# Altium PCB JUNORPC6Cv3.PcbDoc (part 2 of 2)
Units mm, origin at the board's own origin, x right, y up, seen from the top; angles counter-clockwise.
Board outline 175.76 x 100.76 mm, 8 copper layers (Top Layer, Internal Plane 1, Signal Layer 1, Internal Plane 2, Signal Layer 2, Internal Plane 3, Internal Plane 4, Bottom Layer), stack 1.684 mm thick; 107 components, 160 nets, 1032 pads, 524 vias.
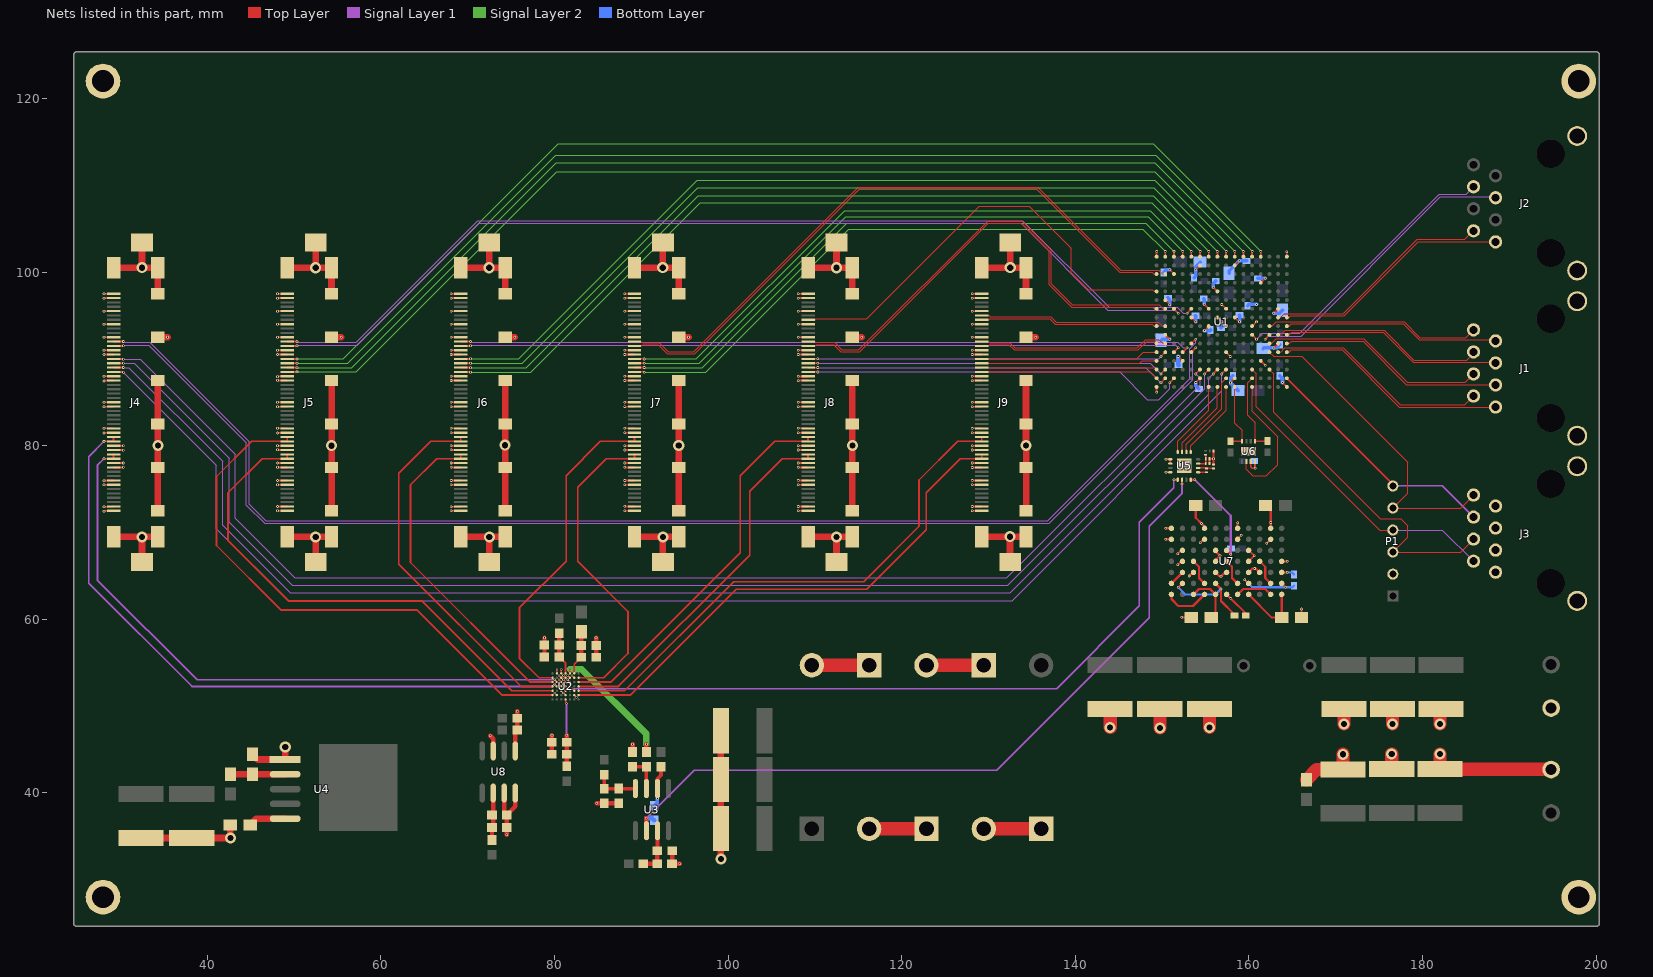
[diagram p8: the nets of this part, all layers, seen from the top]

## Via types
v1: diameter 0.305, hole 0.152, Top Layer to Bottom Layer, 454 vias
v2: diameter 1.27, hole 0.711, Top Layer to Bottom Layer, 47 vias
v3: diameter 0.254, hole 0.127, Top Layer to Bottom Layer, 23 vias

## Nets (pads, with @x,y where several pads share a name; then routed paths per layer and width w, separated by ;. In a path a pad name is that pad's centre, name@x,y a point inside that pad or via, vN(x,y) a via of type N, cw(c..) or ccw(c..) an arc to the next point about the centre after c; other vN are vias at no path point) (continued)
FB5_LVDS33_P: J8.45 U1.T5 | length 51.3
  Top Layer w0.102: J8.45@109.225,94.5 110.051,94.5 110.191,94.64 115.976,94.64 128.93,107.594 134.696,107.594 139.548,102.743 139.548,99.92 141.474,97.993 148.875,97.993 149.094,97.774 U1.T5@149.37,97.774
FB6_LVDS33_N: J9.46 U1.R9 | length 21.7
  Top Layer w0.102: J9.46@129.225,95 130.051,95 130.182,94.869 137.185,94.869 137.82,94.234 149.634,94.234 150.094,93.774 U1.R9@150.37,93.774
FB6_LVDS33_P: J9.45 U1.T9 | length 20.5
  Top Layer w0.102: J9.45@129.225,94.5 130.051,94.5 130.166,94.615 137.08,94.615 137.715,93.98 148.888,93.98 149.094,93.774 U1.T9@149.37,93.774
FB_LVDS33_N: J2.8 U1.A8 | length 27.7
  Top Layer w0.102: U1.A8@164.37,94.774 164.646,94.774 164.842,94.971 170.967,94.971 179.497,103.5 188.397,103.5 J2.8@188.417,103.48
FB_LVDS33_P: J2.7 U1.B8 | length 26.7
  Top Layer w0.102: U1.B8@163.37,94.774 163.646,94.774 164.096,95.225 170.862,95.225 179.392,103.754 184.882,103.754 J2.7@185.877,104.75 J2.7@185.952,104.824
FTCK_LVDS33_N: J1.2 U1.A9 | length 25
  Top Layer w0.102: U1.A9@164.37,93.774 164.646,93.774 164.902,94.031 177.771,94.031 179.6,92.202 188.29,92.202 J1.2@188.417,92.075
FTCK_LVDS33_P: J1.1 U1.C9 | length 24.9
  Top Layer w0.102: U1.C9@162.37,93.774 162.646,93.774 163.156,94.285 177.876,94.285 179.705,92.456 184.988,92.456 J1.1@185.877,93.345 J1.1@185.952,93.419
FTDI_LVDS33_N: J1.4 U1.A10 | length 25.6
  Top Layer w0.102: U1.A10@164.37,92.774 164.646,92.774 164.912,93.04 175.485,93.04 178.914,89.611 188.341,89.611 J1.4@188.417,89.535
FTDI_LVDS33_P: J1.3 U1.B10 | length 24.6
  Top Layer w0.102: U1.B10@163.37,92.774 163.646,92.774 164.166,93.294 175.59,93.294 179.019,89.865 185.09,89.865 185.877,90.653 J1.3@185.877,90.805
FTDO_LVDS33_N: J1.8 U1.A12 | length 26.9
  Top Layer w0.102: U1.A12@164.37,90.774 164.646,90.774 164.905,91.034 170.739,91.034 177.319,84.453 184.966,84.453 184.968,84.455 J1.8@188.417,84.455
FTDO_LVDS33_P: J1.7 U1.B12 | length 25.9
  Top Layer w0.102: U1.B12@163.37,90.774 163.646,90.774 164.157,91.286 164.798,91.286 164.8,91.288 170.844,91.288 177.424,84.707 184.861,84.707 185.877,85.723 J1.7@185.877,85.725
FTMS_LVDS33_N: J1.6 U1.A11 | length 26.3
  Top Layer w0.102: U1.A11@164.37,91.774 164.646,91.774 164.921,92.05 173.148,92.05 178.152,87.046 188.366,87.046 J1.6@188.417,86.995
FTMS_LVDS33_P: J1.5 U1.C11 | length 26.2
  Top Layer w0.102: U1.C11@162.37,91.774 162.646,91.774 163.175,92.304 173.253,92.304 178.257,87.3 184.912,87.3 J1.5@185.877,88.265
GND: C1.1 C2.1 C3.1 C4.1 C5.1 C6.1 C7.1 C8.1 C9.2 C10.2 C11.1 C12.1 C13.1 C14.1 C15.1 C16.1 C17.1 C18.1 C19.2 C20.1 C21.1 C22.1 C23.1 C24.1 C25.1 C26.1 C27.2 C28.2 C29.2 C30.2 C31.1 C32.1 C33.1 C34.1 C35.1 C36.1 C37.1 C38.1 C81.1 C82.1 C83.1 C84.1 C85.1 C86.1 C87.1 C88.1 C89.1 C90.1 C91.1 C92.1 C93.1 C94.1 C95.1 C96.1 C97.1 C98.1 C99.1 C100.1 C101.1 C102.1 C103.1 J3.2 J3.4 J3.6 J3.8 J4.1 J4.2 J4.7 J4.8 J4.11 J4.12 J4.15 J4.16 J4.19 J4.20 J4.25 J4.26 J4.31 J4.32 J4.37 J4.38 J4.41 J4.44 J4.47 J4.50 J4.51 J5.1 J5.2 J5.7 J5.8 J5.11 J5.12 J5.15 J5.16 J5.19 J5.20 J5.25 J5.26 J5.31 J5.32 J5.37 J5.38 J5.41 J5.44 J5.47 J5.50 J5.51 J6.1 J6.2 J6.7 J6.8 J6.11 J6.12 J6.15 J6.16 J6.19 J6.20 J6.25 J6.26 J6.31 J6.32 J6.37 J6.38 J6.41 J6.44 J6.47 J6.50 J6.51 J7.1 J7.2 J7.7 J7.8 J7.11 J7.12 J7.15 J7.16 J7.19 J7.20 J7.25 J7.26 J7.31 J7.32 J7.37 J7.38 J7.41 J7.44 J7.47 J7.50 J7.51 J8.1 J8.2 J8.7 J8.8 J8.11 J8.12 J8.15 J8.16 J8.19 J8.20 J8.25 J8.26 J8.31 J8.32 J8.37 J8.38 J8.41 J8.44 J8.47 J8.50 J8.51 J9.1 J9.2 J9.7 J9.8 J9.11 J9.12 J9.15 J9.16 J9.19 J9.20 J9.25 J9.26 J9.31 J9.32 J9.37 J9.38 J9.41 J9.44 J9.47 J9.50 J9.51 P1.2 P8.2 P9.2 R1.2 R2.2 R9.1 R10.1 R11.1 U1.A1 U1.A16 U1.B7 U1.B11 U1.D4 U1.D13 U1.E9 U1.G2 U1.G8 U1.G15 U1.H7 U1.H9 U1.H12 U1.J5 U1.J8 U1.K7 U1.K9 U1.L2 U1.L15 U1.M8 U1.N13 U1.P3 U1.R6 U1.R10 U1.T1 U1.T16 U2.B2 U2.B6 U2.C2 U2.C3 U2.C4 U2.D2 U2.D3 U2.D4 U2.D5 U2.D6 U2.E1 U2.E2 U2.E3 U2.E4 U2.E5 U2.F1 U2.F6 U4.1 U5.5 U5.6 U5.8 U5.17 U6.0 U6.7 U6.8 U7.A4 U7.A5 U7.B1 U7.B2 U7.C5 U7.D3 U7.D4 U7.D5 U7.E1 U7.E2 U7.F5 U7.F7 U7.G3 U7.G4 U7.G5 U7.H1 U7.H2 U7.J5 U7.K3 U7.K4 U7.L1 U7.L2 U8.3 U8.4 U8.5 U8.7 | length 314.8
  Top Layer w0.152: v3(80.035,51.511) 80.05,51.511 U2.F6@80.288,51.273 ; U2.F1@80.288,53.773 80.288,54.228 v3(80.289,54.229) ; v3(80.543,52.019) 80.543,52.018 U2.E5@80.788,51.773 ; v3(80.543,52.527) 80.788,52.283 U2.E4@80.788,52.273 ; v3(80.543,53.035) 80.543,53.018 U2.E3@80.788,52.773 ; v3(80.543,53.518) U2.E2@80.788,53.273 ; U2.E1@80.788,53.773 v3(80.788,54.229) ; v3(81.026,51.511) 81.05,51.511 U2.D6@81.288,51.273 ; v3(81.026,52.019) 81.042,52.019 U2.D5@81.288,51.773 ; v3(81.026,52.527) 81.28,52.273 U2.D4@81.288,52.273 ; v3(81.026,53.035) U2.D3@81.288,52.773 ; v3(81.026,53.518) 81.271,53.273 U2.D2@81.288,53.273 ; v3(81.534,53.035) 81.534,53.027 U2.C3@81.788,52.773 U2.C4@81.788,52.273 ; v3(81.534,53.518) 81.543,53.518 U2.C2@81.788,53.273 ; v3(82.042,53.518) 82.287,53.273 U2.B2@82.288,53.273 ; U2.B6@82.28,51.273 U2.B6@82.288,51.273 82.305,51.273 v3(82.55,51.029) ; v1(150.444,76.93) 150.449,76.934 U5.8@150.952,76.934 ; v1(150.444,78.434) U5.5@150.952,78.434 U5.6@150.952,77.934 ; U6.7@160.219,78.175 160.219,77.59 160.415,77.394 v1(160.719,77.394) U6.8@160.719,78.175
  Top Layer w0.203: v1(28.118,72.466) 28.152,72.5 J4.1@29.225,72.5 ; v1(28.118,72.974) 29.199,72.974 J4.2@29.225,73 ; v1(28.118,75.5) J4.7@29.225,75.5 ; v1(28.118,75.971) 28.146,76 J4.8@29.225,76 ; v1(28.118,81.458) 28.16,81.5 J4.19@29.225,81.5 ; v1(28.118,82) J4.20@29.225,82 ; v1(28.118,84.5) J4.25@29.225,84.5 ; v1(28.118,85.014) 28.132,85 J4.26@29.225,85 ; v1(28.118,87.452) 28.166,87.5 J4.31@29.225,87.5 ; v1(28.118,87.986) 28.132,88 J4.32@29.225,88 ; v1(28.118,90.5) J4.37@29.225,90.5 ; v1(28.118,91.008) 28.126,91 J4.38@29.225,91 ; v1(28.118,92.507) 28.125,92.5 J4.41@29.225,92.5 ; v1(28.118,94) J4.44@29.225,94 ; v1(28.118,95.5) J4.47@29.225,95.5 ; v1(28.118,97) J4.50@29.225,97 ; v1(28.118,97.5) J4.51@29.225,97.5 ; J4.11@29.225,77.5 30.332,77.5 v1(30.353,77.521) ; J4.12@29.225,78 v1(30.353,78) ; J4.15@29.225,79.5 30.33,79.5 v1(30.353,79.477) ; J4.16@29.225,80 30.338,80 v1(30.353,79.985) ; v1(48.108,72.492) 48.116,72.5 J5.1@49.225,72.5 ; v1(48.108,73) J5.2@49.225,73 ; v1(48.108,75.5) J5.7@49.225,75.5 ; v1(48.108,75.997) 49.222,75.997 J5.8@49.225,76 ; v1(48.108,77.521) 48.128,77.5 J5.11@49.225,77.5 ; v1(48.108,78) J5.12@49.225,78 ; v1(48.108,79.527) 48.135,79.5 J5.15@49.225,79.5 ; v1(48.108,80) J5.16@49.225,80 ; v1(48.108,81.458) 48.15,81.5 J5.19@49.225,81.5 ; v1(48.108,82) J5.20@49.225,82 ; v1(48.108,84.48) 48.127,84.5 J5.25@49.225,84.5 ; v1(48.108,85.014) 48.121,85 J5.26@49.225,85 ; v1(48.108,87.528) 48.136,87.5 J5.31@49.225,87.5 ; v1(48.108,87.96) 48.147,88 J5.32@49.225,88 ; v1(48.108,90.5) J5.37@49.225,90.5 ; v1(48.108,90.983) 48.125,91 J5.38@49.225,91 ; v1(48.108,92.507) 48.114,92.5 J5.41@49.225,92.5 ; v1(48.108,94) J5.44@49.225,94 ; v1(48.108,95.504) 48.112,95.5 J5.47@49.225,95.5 ; v1(48.108,97.003) 48.11,97 J5.50@49.225,97 ; v1(48.108,97.511) 48.118,97.5 J5.51@49.225,97.5 ; v1(68.097,72.5) J6.1@69.225,72.5 ; v1(68.097,72.974) 69.199,72.974 J6.2@69.225,73 ; v1(68.097,75.489) 68.109,75.5 J6.7@69.225,75.5 ; v1(68.097,77.521) 68.118,77.5 J6.11@69.225,77.5 ; v1(68.097,78) J6.12@69.225,78 ; v1(68.097,79.527) 68.125,79.5 J6.15@69.225,79.5 ; v1(68.097,80.01) 68.107,80 J6.16@69.225,80 ; v1(68.097,81.5) J6.19@69.225,81.5 ; v1(68.097,82.017) 68.114,82 J6.20@69.225,82 ; v1(68.097,84.5) J6.25@69.225,84.5 ; v1(68.097,85) J6.26@69.225,85 ; v1(68.097,87.503) 68.1,87.5 J6.31@69.225,87.5 ; v1(68.097,87.986) 68.112,88 J6.32@69.225,88 ; v1(68.097,90.5) J6.37@69.225,90.5 ; v1(68.097,90.983) 68.115,91 J6.38@69.225,91 ; v1(68.097,92.507) 68.104,92.5 J6.41@69.225,92.5 ; v1(68.097,94) J6.44@69.225,94 ; v1(68.097,95.5) J6.47@69.225,95.5 ; v1(68.097,97) J6.50@69.225,97 ; v1(68.097,97.511) 68.108,97.5 J6.51@69.225,97.5 ; v1(68.1,75.997) 68.104,76 J6.8@69.225,76 ; v1(88.113,72.517) 88.13,72.5 J7.1@89.225,72.5 ; v1(88.113,73.025) 88.138,73 J7.2@89.225,73 ; v1(88.113,75.514) 88.127,75.5 J7.7@89.225,75.5 ; v1(88.113,75.997) 88.116,76 J7.8@89.225,76 ; v1(88.113,77.521) 88.133,77.5 J7.11@89.225,77.5 ; v1(88.113,78) J7.12@89.225,78 ; v1(88.113,79.502) 88.115,79.5 J7.15@89.225,79.5 ; v1(88.113,80) J7.16@89.225,80 ; v1(88.113,81.509) 88.121,81.5 J7.19@89.225,81.5 ; v1(88.113,82) J7.20@89.225,82 ; v1(88.113,84.506) 88.118,84.5 J7.25@89.225,84.5 ; v1(88.113,84.988) 88.124,85 J7.26@89.225,85 ; v1(88.113,87.503) 88.116,87.5 J7.31@89.225,87.5 ; v1(88.113,88.011) 88.124,88 J7.32@89.225,88 ; v1(88.113,90.5) J7.37@89.225,90.5 ; v1(88.113,91) J7.38@89.225,91 ; v1(88.113,92.507) 88.119,92.5 J7.41@89.225,92.5 ; v1(88.113,94.005) 88.118,94 J7.44@89.225,94 ; v1(88.113,95.504) 88.117,95.5 J7.47@89.225,95.5 ; v1(88.113,97.003) 88.115,97 J7.50@89.225,97 ; v1(88.113,97.5) J7.51@89.225,97.5 ; v1(108.102,72.492) 108.111,72.5 J8.1@109.225,72.5 ; v1(108.102,73) J8.2@109.225,73 ; v1(108.102,75.5) J8.7@109.225,75.5 ; v1(108.102,76) J8.8@109.225,76 ; v1(108.102,77.5) J8.11@109.225,77.5 ; v1(108.102,78.003) 108.106,78 J8.12@109.225,78 ; v1(108.102,79.502) 108.104,79.5 J8.15@109.225,79.5 ; v1(108.102,79.985) 108.118,80 J8.16@109.225,80 ; v1(108.102,81.5) J8.19@109.225,81.5 ; v1(108.102,82) J8.20@109.225,82 ; v1(108.102,84.5) J8.25@109.225,84.5 ; v1(108.102,85) J8.26@109.225,85 ; v1(108.102,87.5) J8.31@109.225,87.5 ; v1(108.102,87.986) 109.211,87.986 J8.32@109.225,88 ; v1(108.102,90.5) J8.37@109.225,90.5 ; v1(108.102,91) J8.38@109.225,91 ; v1(108.102,92.507) 108.109,92.5 J8.41@109.225,92.5 ; v1(108.102,94.005) 108.108,94 J8.44@109.225,94 ; v1(108.102,95.504) 108.106,95.5 J8.47@109.225,95.5 ; v1(108.102,97) J8.50@109.225,97 ; v1(108.102,97.511) 108.113,97.5 J8.51@109.225,97.5 ; v1(128.118,72.492) 128.126,72.5 J9.1@129.225,72.5 ; v1(128.118,73) J9.2@129.225,73 ; v1(128.118,75.5) J9.7@129.225,75.5 ; v1(128.118,76) J9.8@129.225,76 ; v1(128.118,77.495) 128.122,77.5 J9.11@129.225,77.5 ; v1(128.118,78) J9.12@129.225,78 ; v1(128.118,79.502) 128.12,79.5 J9.15@129.225,79.5 ; v1(128.118,79.998) 128.12,80 J9.16@129.225,80 ; v1(128.118,81.5) J9.19@129.225,81.5 ; v1(128.118,81.991) 128.126,82 J9.20@129.225,82 ; v1(128.118,84.5) J9.25@129.225,84.5 ; v1(128.118,85) J9.26@129.225,85 ; v1(128.118,87.5) J9.31@129.225,87.5 ; v1(128.118,87.986) 128.132,88 J9.32@129.225,88 ; v1(128.118,90.5) J9.37@129.225,90.5 ; v1(128.118,91) J9.38@129.225,91 ; v1(128.118,92.5) J9.41@129.225,92.5 ; v1(128.118,94) J9.44@129.225,94 ; v1(128.118,95.504) 128.122,95.5 J9.47@129.225,95.5 ; v1(128.118,97) J9.50@129.225,97 ; v1(128.118,97.5) J9.51@129.225,97.5 ; v1(149.37,86.171) U1.T16@149.37,86.774 ; U1.T1@149.37,101.774 v1(149.37,102.38) ; U1.R10@150.345,92.774 U1.R10@150.37,92.774 v1(150.874,92.271) ; U1.R6@150.361,96.774 U1.R6@150.37,96.774 150.873,96.271 v1(150.873,96.254) ; v1(150.874,100.272) 150.874,100.27 U1.P3@151.37,99.774 ; v1(151.867,90.272) 151.872,90.272 U1.N13@152.37,89.774 U1.N13@152.365,89.774 ; U1.M8@153.37,94.774 153.37,94.767 v1(153.873,94.263) ; v1(153.871,87.278) 153.874,87.278 U1.L15@154.37,87.774 ; v1(153.871,100.279) 154.366,100.774 U1.L2@154.37,100.774 U1.L2@154.37,100.8 ; v1(154.862,96.284) 155.37,95.776 U1.K7@155.37,95.774 ; v1(154.887,93.261) 155.37,93.744 U1.K9@155.37,93.774 ; C27.2@155.466,77.934 C28.2@155.466,78.497 v1(155.931,78.497) ; v1(155.878,98.265) U1.J5@156.37,97.774 ; C30.2@155.931,77.83 v1(155.931,78.497) ; C29.2@155.931,79.412 v1(155.931,78.497) ; U1.J8@156.37,94.774 156.37,94.762 v1(156.868,94.263) 157.358,93.774 U1.H9@157.37,93.774 ; v1(156.868,96.27) 157.364,95.774 U1.H7@157.37,95.774 ; U1.H12@157.37,90.774 157.37,90.765 v1(157.859,90.275) ; v1(157.884,87.267) 158.37,87.752 U1.G15@158.37,87.774 ; U1.G8@158.37,94.774 158.881,94.263 v1(158.926,94.263) ; U1.G2@158.37,100.774 158.875,101.279 v1(158.875,101.292) ; U1.E9@160.37,93.774 160.387,93.774 v1(160.872,94.259) ; U1.D13@161.37,89.774 161.87,89.274 v1(161.872,89.274) ; U1.D4@161.37,98.774 161.37,98.779 v1(161.872,99.281) ; v1(162.868,91.262) 163.37,91.764 U1.B11@163.37,91.774 U1.B11@163.41,91.774 ; v1(162.868,95.275) 162.871,95.275 U1.B7@163.37,95.774 U1.B7@163.37,95.782 ; v1(163.872,87.274) 164.37,86.777 U1.A16@164.37,86.774 ; U1.A1@164.37,101.774 v1(164.37,102.355)
  Top Layer w0.254: v1(150.419,69.215) U7.L2@151.079,69.215 ; v1(150.419,70.485) U7.L1@151.079,70.485 ; v1(151.816,66.269) 152.222,66.675 U7.K4@152.349,66.675 ; v1(151.816,67.564) 152.197,67.945 U7.K3@152.349,67.945 ; v1(152.273,60.223) R11.1@153.365,60.223 ; v1(153.111,64.999) 153.518,65.405 U7.J5@153.619,65.405 ; C17.1@153.873,73.101 153.873,71.704 v1(154.534,71.044) 154.889,70.688 U7.H1@154.889,70.485 ; v1(154.381,68.834) 154.762,69.215 U7.H2@154.889,69.215 ; U7.G5@156.159,65.405 156.616,64.948 v1(156.794,64.948) 157.251,65.405 U7.F5@157.429,65.405 ; U7.G4@156.159,66.675 156.159,66.804 v1(156.665,67.31) 156.159,67.816 U7.G3@156.159,67.945 ; U7.F7@157.429,62.865 157.455,62.865 v1(157.912,62.408) 159.629,60.691 C18.1@159.629,60.452 ; U7.E2@158.699,69.215 158.699,69.266 v1(159.131,69.698) ; U7.E1@158.699,70.485 v1(158.699,71.12) ; U7.D5@159.969,65.405 160.426,65.862 v1(160.655,65.862) 160.782,65.862 U7.C5@161.239,65.405 ; U7.D4@159.969,66.675 v1(160.604,67.31) U7.D3@159.969,67.945 ; v1(162.052,68.758) U7.B2@162.509,69.215 ; C15.1@162.052,72.974 C15.1@161.925,73.101 162.509,72.517 v1(162.509,71.145) U7.B1@162.509,70.485 ; U7.A5@163.779,65.405 v1(164.414,65.405) ; U7.A4@163.779,66.675 v1(164.414,66.675) ; R9.1@166.065,60.198 v1(166.065,61.189)
  Top Layer w0.508: U4.1@48.985,43.846 U4.1@48.997,43.858 ; v1(72.619,46.584) 72.949,46.253 U8.7@72.949,44.843 ; U8.3@74.219,39.993 74.219,37.756 C37.1@74.51,37.465 ; v1(74.51,35.179) C38.1@74.51,36.017 C37.1@74.51,37.465 ; U8.4@75.489,39.993 75.489,38.444 C37.1@74.51,37.465 ; U8.5@75.489,44.843 75.489,47.029 C35.1@75.704,47.244 C36.1@75.704,48.59 v1(75.704,49.428) ; C32.1@78.855,55.667 C31.1@78.855,57.039 v1(78.855,57.887) ; C14.1@79.716,44.475 C20.1@79.716,45.822 v1(79.716,46.66) ; C33.1@84.797,55.617 C34.1@84.797,56.988 v1(84.797,57.887) ; v1(84.887,38.799) C13.1@85.725,38.799 87.415,38.799 C12.1@87.427,38.811 ; R10.1@89.002,44.716 v1(89.002,45.618) ; C7.1@93.562,33.325 93.562,31.84 C11.1@93.548,31.826 v1(94.437,31.826)
  Top Layer w0.762: C10.2@32.385,34.813 42.662,34.813 v2(42.672,34.823) R1.2@42.672,36.322 ; R2.2@45.212,44.45 45.816,43.846 U4.1@48.985,43.846 ; U4.1@48.997,43.858 v2(48.997,45.288) ; v2(99.177,32.385) C4.1@99.177,47.168 ; C22.1@149.733,49.672 C22.1@149.758,49.647 ; C26.1@182.016,49.57 C26.1@182.118,49.672
  Top Layer w1.524: v2(144.018,47.523) C21.1@144.018,49.672 ; v2(149.758,47.498) C22.1@149.758,49.647 ; v2(155.448,47.523) C23.1@155.448,49.672 ; C8.1@166.649,41.529 167.828,42.708 C3.1@170.84,42.708 v2(170.84,44.45) ; v2(170.942,47.93) C24.1@170.942,49.672 ; C2.1@176.454,42.733 v2(176.454,44.475) ; C25.1@176.53,49.672 176.555,49.647 v2(176.555,47.93) ; v2(182.016,44.475) C1.1@182.016,42.733 194.782,42.733 P8.2@194.818,42.697 ; v2(182.016,47.93) C26.1@182.016,49.57
  Bottom Layer w0.152: C19.2@160.615,78.251 160.719,78.147 v1(160.719,77.394)
  Bottom Layer w0.254: v1(164.414,65.405) 164.963,65.405 C16.1@165.202,65.166
  Bottom Layer w0.406: C85.1@149.885,92.151 150.005,92.271 v1(150.874,92.271) ; C98.1@150.19,99.964 150.498,100.272 v1(150.874,100.272) ; C99.1@150.681,97.021 150.873,96.829 v1(150.873,96.254) ; C90.1@153.695,99.354 153.871,99.53 v1(153.871,100.279) 153.871,100.633 C97.1@154.381,101.143 ; C89.1@153.843,94.971 153.873,94.941 v1(153.873,94.263) ; v1(153.871,87.278) 153.871,86.922 C83.1@154.237,86.556 ; C94.1@154.798,96.952 154.862,96.888 v1(154.862,96.284) ; v1(154.887,93.261) 155.533,93.261 C96.1@155.598,93.327 ; v1(155.878,98.265) 155.878,98.682 C87.1@156.172,98.976 ; C93.1@156.777,93.566 156.868,93.657 v1(156.868,94.263) ; C92.1@157.734,99.873 157.734,100.151 v1(158.875,101.292) 159.717,101.292 C86.1@159.724,101.286 ; C82.1@158.164,88.039 157.884,87.76 v1(157.884,87.267) 157.884,87.216 C81.1@158.748,86.353 ; C95.1@158.915,95.039 158.926,95.029 v1(158.926,94.263) ; C91.1@159.864,96.124 160.009,96.27 v1(160.882,96.27) ; C103.1@161.026,99.281 v1(161.872,99.281) ; C88.1@161.646,91.186 161.722,91.262 v1(162.868,91.262) 163.208,91.262 C101.1@163.574,91.628 ; v1(162.868,95.275) 163.542,95.275 C100.1@163.872,95.606 ; C102.1@163.551,88.062 163.872,87.74 v1(163.872,87.274)
  Bottom Layer w0.508: v1(151.867,90.272) 151.867,89.314 C84.1@151.907,89.274
  other v1: 152.959,77.202 152.146,78.065 159.969,79.35
JTAG_TCK: J3.5 P1.3 U1.C14 | length 39.7
  Top Layer w0.102: U1.C14@162.37,88.774 162.868,88.275 162.868,83.867 175.158,71.577 177.521,71.577 178.308,70.79 178.308,69.469 P1.3@176.581,67.742 184.379,67.742 J3.5@185.877,69.24
JTAG_TDI: J3.1 P1.5 U1.C12 | length 37.1
  Top Layer w0.102: U1.C12@162.37,90.774 162.868,90.275 166.112,90.275 178.308,78.08 178.308,74.549 P1.5@176.581,72.822 184.379,72.822 J3.1@185.877,74.32
JTAG_TDO: J3.7 P1.4 U1.E14 | length 36.9
  Top Layer w0.102: U1.E14@160.37,88.774 160.872,88.272 160.872,84.466 175.057,70.282 P1.4@176.581,70.282
  Signal Layer 1 w0.102: P1.4@176.581,70.282 182.296,70.282 J3.7@185.877,66.7
JTAG_TMS: J3.3 P1.6 U1.A15 | length 28.2
  Top Layer w0.152: U1.A15@164.37,87.774 176.581,75.563 P1.6@176.581,75.362
  Signal Layer 1 w0.152: P1.6@176.581,75.362 182.296,75.362 J3.3@185.877,71.781
NetC7_2: C7.2 C11.2 R4.1 U3.7 | length 5.4
  Top Layer w0.508: R4.1@90.258,31.826 C11.2@91.848,31.826 91.862,31.84 C7.2@91.862,33.325 91.872,33.335 U3.7@91.872,35.65
NetC12_2: C12.2 C13.2 R14.2 U3.4 | length 5.2
  Top Layer w0.406: R14.2@85.725,42.113 85.725,40.486 85.739,40.5 U3.4@89.332,40.5
NetC14_2: C14.2 C20.2 R15.2 U2.D7 | length 7.8
  Top Layer w0.152: U2.D7@81.288,50.773 81.288,50.436 v3(81.407,50.317)
  Top Layer w0.508: v1(81.407,46.66) 81.407,43.074 R15.2@81.416,43.065
  Signal Layer 1 w0.254: v1(81.407,46.66) v3(81.407,50.317)
NetC16_2: C16.2 U7.A6 U7.D6 | length 7.4
  Top Layer w0.254: v1(159.512,64.567) 159.537,64.567 U7.D6@159.969,64.135 ; U7.A6@163.779,64.135 164.211,63.703 v1(164.262,63.703)
  Bottom Layer w0.254: v1(159.512,64.567) 160.376,63.703 v1(164.262,63.703) 165.039,63.703 C16.2@165.202,63.866
NetC18_2: C18.2 U7.G6 U7.K6 | length 10.8
  Top Layer w0.254: v1(151.867,63.678) 151.892,63.678 U7.K6@152.349,64.135 ; U7.G6@156.159,64.135 v1(156.794,63.5) 156.794,62.103 158.329,60.569 C18.2@158.329,60.452
  Bottom Layer w0.254: v1(151.867,63.678) 152.679,62.865 156.159,62.865 v1(156.794,63.5)
NetC27_1: C27.1 C28.1 R16.1 U5.15 | length 1.9
  Top Layer w0.152: U5.15@154.152,77.934 C27.1@155.016,77.934 C28.1@155.016,78.497 R16.1@155.016,78.962
NetC30_1: C30.1 R18.1 U5.14 | length 1.8
  Top Layer w0.152: U5.14@154.152,77.434 155.038,77.434 R18.1@155.092,77.38 C30.1@155.931,77.38
NetC31_2: C31.2 C32.2 R17.2 U2.D1 | length 4.9
  Top Layer w0.203: C32.2@80.555,55.667 81.288,54.935 U2.D1@81.288,53.773
  Top Layer w0.508: C32.2@80.555,55.667 C31.2@80.555,57.039 80.555,58.397 R17.2@80.569,58.411
NetC33_2: C33.2 C34.2 L2.1 U2.B1 | length 5.1
  Top Layer w0.203: U2.B1@82.288,53.773 82.288,54.808 C33.2@83.097,55.617
  Top Layer w0.508: C33.2@83.097,55.617 C34.2@83.097,56.988 83.097,58.526 L2.1@83.134,58.563
NetC37_2: C37.2 C38.2 R19.2 U8.2 | length 5.5
  Top Layer w0.508: R19.2@72.81,34.581 C38.2@72.81,36.017 72.949,36.156 U8.2@72.949,39.993
NetD1_2: D1.2 D2.1 | length 6.6
  Top Layer w1.524: D2.1@129.464,35.868 D1.2@136.068,35.868
NetD2_2: D2.2 D3.1 | length 6.6
  Top Layer w1.524: D3.1@122.86,54.708 D2.2@129.464,54.708
NetD3_2: D3.2 D4.1 | length 6.6
  Top Layer w1.524: D4.1@116.256,35.868 D3.2@122.86,35.868
NetD4_2: D4.2 D5.1 | length 6.6
  Top Layer w1.524: D5.1@109.652,54.708 D4.2@116.256,54.708
NetR1_1: R1.1 U4.5 | length 4.3
  Top Layer w0.762: R1.1@44.958,36.322 45.675,37.039 U4.5@48.985,37.039
NetR2_1: R2.1 R3.2 U4.2 | length 6.3
  Top Layer w0.762: R3.2@42.672,42.164 42.691,42.145 U4.2@48.985,42.145
NetR6_2: R6.2 R7.1 U3.2 | length 3.7
  Top Layer w0.406: U3.2@91.872,40.5 91.872,41.631 92.278,42.037 R6.2@92.278,43.016
  Bottom Layer w0.406: R7.1@91.491,38.544 91.872,38.925 v1(91.872,39.37)
NetR8_1: R8.1 U2.C1 | length 14.4
  Top Layer w0.152: U2.C1@81.788,53.773 v3(81.788,54.229)
  Top Layer w0.508: R8.1@90.602,44.716 v1(90.602,45.618)
  Signal Layer 2 w0.762: v3(81.788,54.229) 83.16,54.229 90.602,46.787 v1(90.602,45.618)
NetR8_2: R8.2 R10.2 U3.3 | length 4.1
  Top Layer w0.406: R10.2@89.002,43.016 R8.2@90.602,43.016 U3.3@90.602,40.5
NetR9_2: R9.2 U7.A7 U7.D7 | length 7.6
  Top Layer w0.254: U7.D7@159.969,62.865 162.636,60.198 R9.2@163.779,60.198 U7.A7@163.779,62.865
NetR11_2: R11.2 U7.G7 U7.J7 | length 5.9
  Top Layer w0.254: U7.J7@153.619,62.865 154.254,63.5 155.524,63.5 U7.G7@156.159,62.865 156.159,60.731 R11.2@155.651,60.223
NetR18_2: R18.2 U5.13 | length 0.9
  Top Layer w0.152: U5.13@154.152,76.934 155.088,76.934 R18.2@155.092,76.93
NetU7_b6: U7.B6 U7.C4 | length 3.1
  Top Layer w0.254: U7.C4@161.239,66.675 161.874,66.04 161.874,64.77 U7.B6@162.509,64.135
NetU7_b7: U7.B7 U7.E7 | length 4.3
  Top Layer w0.254: U7.E7@158.699,62.865 159.334,63.5 161.874,63.5 U7.B7@162.509,62.865
NetU7_e6: U7.E6 U7.F4 | length 3.1
  Top Layer w0.254: U7.F4@157.429,66.675 158.064,66.04 158.064,64.77 U7.E6@158.699,64.135
NetU7_h6: U7.H6 U7.J4 | length 3.1
  Top Layer w0.254: U7.J4@153.619,66.675 154.254,66.04 154.254,64.77 U7.H6@154.889,64.135
NetU7_h7: U7.H7 U7.L7 | length 5.2
  Top Layer w0.254: U7.L7@151.079,62.865 151.079,62.332 151.867,61.544 153.568,61.544 U7.H7@154.889,62.865
NetU7_k5: U7.K5 U7.L6 | length 1.8
  Top Layer w0.254: U7.L6@151.079,64.135 U7.K5@152.349,65.405
nRESET_LVCMOS33: U1.E16 U6.6 | length 15.5
  Top Layer w0.102: U6.6@159.719,78.175 159.719,77.263 160.452,76.53 162.001,76.53 163.297,77.826 163.297,81.051 160.37,83.978 U1.E16@160.37,86.774
PGND1: J4.52 J4.53 J4.54 J4.55 J4.56 J4.57 J4.58 J4.59 J4.60 J4.61 J4.62 J4.63 J5.52 J5.53 J5.54 J5.55 J5.56 J5.57 J5.58 J5.59 J5.60 J5.61 J5.62 J5.63 J6.52 J6.53 J6.54 J6.55 J6.56 J6.57 J6.58 J6.59 J6.60 J6.61 J6.62 J6.63 J7.52 J7.53 J7.54 J7.55 J7.56 J7.57 J7.58 J7.59 J7.60 J7.61 J7.62 J7.63 J8.52 J8.53 J8.54 J8.55 J8.56 J8.57 J8.58 J8.59 J8.60 J8.61 J8.62 J8.63 J9.52 J9.53 J9.54 J9.55 J9.56 J9.57 J9.58 J9.59 J9.60 J9.61 J9.62 J9.63 pad.0 | length 210.8
  Top Layer w0.762: J4.52@29.225,69.5 v2(32.5,69.5) ; J4.61@29.225,100.5 29.228,100.503 v2(32.5,100.503) ; J4.62@32.5,66.6 v2(32.5,69.5) ; J4.63@32.5,103.4 v2(32.5,100.503) ; J4.54@34.324,72.5 34.322,72.503 v2(34.322,80.035) 34.322,87.497 J4.57@34.325,87.5 ; J4.53@34.325,69.5 v2(32.5,69.5) ; J4.58@34.325,92.5 v1(35.433,92.5) ; J4.59@34.325,97.5 J4.60@34.325,100.5 34.322,100.503 v2(32.5,100.503) ; J5.52@49.225,69.5 v2(52.5,69.5) ; J5.61@49.225,100.5 v2(52.502,100.5) ; J5.62@52.5,66.6 v2(52.5,69.5) ; J5.63@52.5,103.4 52.502,103.398 v2(52.502,100.5) ; J5.54@54.324,72.5 54.331,72.506 v2(54.331,79.998) 54.331,87.494 J5.57@54.325,87.5 ; J5.53@54.325,69.5 v2(52.5,69.5) ; J5.58@54.325,92.5 v1(55.448,92.5) ; J5.59@54.325,97.5 J5.60@54.325,100.5 v2(52.502,100.5) ; J6.52@69.225,69.5 v2(72.5,69.5) ; J6.61@69.225,100.5 v2(72.492,100.5) ; J6.62@72.5,66.6 v2(72.5,69.5) ; J6.63@72.5,103.4 72.492,103.392 v2(72.492,100.5) ; J6.54@74.324,72.5 v2(74.324,80.061) 74.324,87.499 J6.57@74.325,87.5 ; J6.53@74.325,69.5 v2(72.5,69.5) ; J6.58@74.325,92.5 v1(75.438,92.5) ; J6.59@74.325,97.5 J6.60@74.325,100.5 v2(72.492,100.5) ; J7.52@89.225,69.5 v2(92.5,69.5) ; J7.61@89.225,100.5 89.228,100.503 v2(92.481,100.503) ; J7.62@92.5,66.6 v2(92.5,69.5) ; J7.63@92.5,103.4 92.481,103.381 v2(92.481,100.503) ; J7.54@94.324,72.5 94.325,72.501 J7.55@94.325,77.5 v2(94.325,80.035) J7.56@94.325,82.5 J7.57@94.325,87.5 ; J7.53@94.325,69.5 v2(92.5,69.5) ; J7.58@94.325,92.5 v1(95.453,92.5) ; J7.59@94.325,97.5 J7.60@94.325,100.5 94.322,100.503 v2(92.481,100.503) ; J8.52@109.225,69.5 109.231,69.494 v2(112.497,69.494) ; J8.61@109.225,100.5 v2(112.497,100.5) ; J8.62@112.5,66.6 112.497,66.603 v2(112.497,69.494) ; J8.63@112.5,103.4 112.5,100.503 v2(112.497,100.5) ; J8.54@114.324,72.5 114.325,72.501 J8.55@114.325,77.5 v2(114.325,80.035) J8.57@114.325,87.5 ; J8.53@114.325,69.5 114.319,69.494 v2(112.497,69.494) ; J8.58@114.325,92.5 v1(115.418,92.5) ; J8.59@114.325,97.5 J8.60@114.325,100.5 v2(112.497,100.5) ; J9.52@129.225,69.5 132.467,69.5 v2(132.486,69.52) ; J9.61@129.225,100.5 132.504,100.5 v2(132.512,100.508) ; J9.62@132.5,66.6 132.486,66.614 v2(132.486,69.52) ; J9.63@132.5,103.4 132.5,100.52 v2(132.512,100.508) ; J9.54@134.324,72.5 134.341,72.516 v2(134.341,80.035) 134.325,80.051 J9.56@134.325,82.5 J9.57@134.325,87.5 ; J9.53@134.325,69.5 134.305,69.52 v2(132.486,69.52) ; J9.58@134.325,92.5 v1(135.433,92.5) ; J9.59@134.325,97.5 J9.60@134.325,100.5 134.317,100.508 v2(132.512,100.508)
PGND2: J1.9 J1.10 J2.9 J2.10 J3.9 J3.10
RESET1_LVDS33_N: J4.40 U1.M11 | length 149
  Top Layer w0.203: J4.40@29.225,92 v1(30.353,92) ; U1.M11@153.37,91.774 153.376,91.774 v1(153.873,92.271)
  Signal Layer 1 w0.102: v1(30.353,92) 30.451,91.902 33.375,91.902 44.831,80.446 44.831,73.279 46.736,71.374 136.855,71.374 153.213,87.732 153.213,91.186 153.873,91.846 v1(153.873,92.271)
RESET1_LVDS33_P: J4.39 U1.M12 | length 148.4
  Top Layer w0.203: J4.39@29.225,91.5 v1(30.353,91.5) ; U1.M12@153.37,90.774 153.873,91.277 v1(153.873,91.28)
  Signal Layer 1 w0.102: v1(30.353,91.5) 30.451,91.598 33.249,91.598 44.526,80.32 44.526,73.153 46.61,71.069 136.981,71.069 153.518,87.605 153.518,90.925 v1(153.873,91.28)
RESET2_LVDS33_N: J5.40 U1.M7 | length 114.6
  Top Layer w0.203: J5.40@49.225,92 v1(50.343,92) ; v1(152.881,95.275) 152.881,95.285 U1.M7@153.37,95.774
  Signal Layer 1 w0.102: v1@50.347,92 v1@50.444,91.902 ; v1@50.44,91.902 v1@50.444,91.902 ; v1(152.881,95.275) 152.425,95.275 151.765,95.936 143.89,95.936 133.908,105.918 71.196,105.918 57.181,91.902 v1@50.444,91.902
RESET2_LVDS33_P: J5.39 U1.P7 | length 113.5
  Top Layer w0.203: J5.39@49.225,91.5 v1(50.343,91.5) ; U1.P7@151.37,95.774 151.37,95.763 v1(151.865,95.268)
  Signal Layer 1 w0.102: v1@50.347,91.5 v1@50.444,91.598 ; v1@50.44,91.598 v1@50.444,91.598 ; v1(151.865,95.268) 151.502,95.631 143.764,95.631 133.782,105.613 71.322,105.613 57.307,91.598 v1@50.444,91.598
RESET3_LVDS33_N: J6.40 U1.N12 | length 84.7
  Top Layer w0.203: J6.40@69.225,92 v1(70.333,92) ; U1.N12@152.37,90.774 152.374,90.774 v1(152.881,91.28)
  Signal Layer 1 w0.102: v1@70.337,92 v1@70.434,91.902 ; v1@70.43,91.902 v1@70.434,91.902 ; v1(152.881,91.28) 152.433,91.28 151.811,91.902 v1@70.434,91.902
RESET3_LVDS33_P: J6.39 U1.P12 | length 83.5
  Top Layer w0.203: J6.39@69.225,91.5 v1(70.333,91.5) ; U1.P12@151.37,90.774 151.867,91.271 v1(151.867,91.28)
  Signal Layer 1 w0.102: v1@70.337,91.5 v1@70.434,91.598 ; v1@70.43,91.598 v1@70.434,91.598 ; v1(151.867,91.28) 151.549,91.598 v1@70.434,91.598
RESET4_LVDS33_N: J7.40 U1.R3 | length 73.6
  Top Layer w0.102: J7.40@89.225,92 90.051,92 90.179,91.872 92.05,91.872 93.091,90.83 96.059,90.83 115.008,109.779 135.661,109.779 145.212,100.228 149.64,100.228 150.094,99.774 U1.R3@150.37,99.774
RESET4_LVDS33_P: J7.39 U1.T3 | length 72.5
  Top Layer w0.102: J7.39@89.225,91.5 90.051,91.5 90.169,91.618 91.944,91.618 92.986,90.576 96.164,90.576 115.113,109.525 135.556,109.525 145.107,99.974 148.894,99.974 149.094,99.774 U1.T3@149.37,99.774
RESET5_LVDS33_N: J8.40 U1.R7 | length 54.1
  Top Layer w0.102: J8.40@109.225,92 110.051,92 110.154,91.897 112.268,91.897 113.106,91.059 115.084,91.059 129.894,105.869 133.911,105.869 137.262,102.518 137.262,98.628 139.675,96.215 149.653,96.215 150.094,95.774 U1.R7@150.37,95.774
RESET5_LVDS33_P: J8.39 U1.T7 | length 53
  Top Layer w0.102: J8.39@109.225,91.5 110.051,91.5 110.194,91.643 112.163,91.643 113.001,90.805 115.189,90.805 129.999,105.615 133.805,105.615 137.008,102.413 137.008,98.523 139.569,95.961 148.907,95.961 149.094,95.774 U1.T7@149.37,95.774
RESET6_LVDS33_N: J9.40 U1.R11 | length 22
  Top Layer w0.102: J9.40@129.225,92 130.051,92 130.174,91.877 132.459,91.877 133.049,91.288 147.168,91.288 148.107,92.227 149.641,92.227 150.094,91.774 U1.R11@150.37,91.774
RESET6_LVDS33_P: J9.39 U1.T11 | length 20.9
  Top Layer w0.102: J9.39@129.225,91.5 130.051,91.5 130.174,91.623 132.354,91.623 132.944,91.034 147.273,91.034 148.213,91.973 149.17,91.973 U1.T11@149.37,91.774
RESET_LVDS33_N: J2.4 U1.C10 | length 34.1
  Top Layer w0.203: v1(161.866,92.271) U1.C10@162.37,92.774
  Signal Layer 1 w0.102: v1(161.866,92.271) 162.229,92.634 166.014,92.634 182.041,108.661 188.316,108.661 J2.4@188.417,108.56
RESET_LVDS33_P: J2.3 U1.E10 | length 33
  Top Layer w0.203: U1.E10@160.37,92.774 160.378,92.774 v1(160.882,92.271)
  Signal Layer 1 w0.102: v1(160.882,92.271) 161.549,92.939 165.887,92.939 181.915,108.966 185.013,108.966 J2.3@185.877,109.83
SCL_LVCMOS33: R12.2 U1.G16 U6.4 | length 8
  Top Layer w0.102: U1.G16@158.37,86.774 158.37,82.601 159.219,81.751 U6.4@159.219,80.525
  Top Layer w0.152: R12.2@157.861,80.508 157.878,80.525 U6.4@159.219,80.525
SDA_LVCMOS33: R13.2 U1.E15 U6.1 | length 9.2
  Top Layer w0.102: U1.E15@160.37,87.774 159.866,87.27 159.866,83.492 160.719,82.638 U6.1@160.719,80.525
  Top Layer w0.152: U6.1@160.719,80.525 162.097,80.525 R13.2@162.124,80.552
TADC_nINT_LVCMOS33: U1.H15 U5.2 | length 10.4
  Top Layer w0.102: U5.2@152.802,79.284 152.802,80.184 156.87,84.252 156.87,87.275 U1.H15@157.37,87.774
TADC_nRESET_LVCMOS33: U1.H16 U5.1 | length 9.2
  Top Layer w0.102: U5.1@153.302,79.284 153.302,79.998 157.37,84.065 U1.H16@157.37,86.774
TADC_SCLK_LVCMOS33: U1.J16 U5.3 | length 9.2
  Top Layer w0.102: U5.3@152.302,79.284 152.302,80.323 156.37,84.39 U1.J16@156.37,86.774
TADC_SDA_LVCMOS33: U1.K16 U5.4 | length 9
  Top Layer w0.102: U5.4@151.802,79.284 151.802,80.505 155.37,84.072 U1.K16@155.37,86.774
TCK1_LVCMOS33: J4.35 U1.K14 | length 152.4
  Top Layer w0.203: J4.35@29.225,89.5 v1(30.353,89.5) ; v1(154.887,88.265) 155.37,88.748 U1.K14@155.37,88.774
  Signal Layer 1 w0.102: v1(30.353,89.5) 31.607,89.5 42.545,78.562 42.545,71.171 49.809,63.906 132.207,63.906 154.887,86.587 v1(154.887,88.265)
TCK2_LVCMOS33: J5.35 U1.E1 | length 126.3
  Top Layer w0.203: J5.35@49.225,89.5 50.327,89.5 v1(50.343,89.484) ; U1.E1@160.37,101.774 160.37,102.374 v1(160.376,102.38)
  Signal Layer 2 w0.102: v1(50.343,89.484) 56.185,89.484 80.162,113.462 149.294,113.462 v1(160.376,102.38)
TCK3_LVCMOS33: J6.35 U1.J1 | length 99.2
  Top Layer w0.203: J6.35@69.225,89.5 v1(70.333,89.5) ; v1(156.362,102.38) 156.37,102.373 U1.J1@156.37,101.774
  Signal Layer 2 w0.102: v1(70.333,89.5) 76.308,89.5 96.536,109.728 149.014,109.728 v1(156.362,102.38)
TCK4_LVCMOS33: J7.35 U1.N1 | length 72.4
  Top Layer w0.152: J7.35@89.225,89.5 90.332,89.5 v1(90.348,89.484)
  Top Layer w0.203: U1.N1@152.37,101.774 152.37,102.375 v1(152.375,102.38)
  Signal Layer 2 w0.102: v1(90.348,89.484) 96.697,89.484 113.588,106.375 148.379,106.375 v1(152.375,102.38)
TCK5_LVCMOS33: J8.35 U1.R14 | length 41.9
  Top Layer w0.152: J8.35@109.225,89.5 v1(110.338,89.5)
  Top Layer w0.203: v1(149.871,88.265) 149.871,88.275 U1.R14@150.37,88.774
  Signal Layer 1 w0.102: v1(110.338,89.5) 148.636,89.5 v1(149.871,88.265)
TCK6_LVCMOS33: J9.35 U1.T13 | length 20.3
  Top Layer w0.102: J9.35@129.225,89.5 147.437,89.5 147.711,89.774 U1.T13@149.37,89.774
TDI1_LVCMOS33: J4.33 U1.H14 | length 155.5
  Top Layer w0.203: J4.33@29.225,88.5 30.321,88.5 v1(30.353,88.468) ; v1(156.87,88.265) 156.87,88.275 U1.H14@157.37,88.774
  Signal Layer 1 w0.102: v1(30.353,88.468) 41.072,77.749 41.072,70.46 49.378,62.154 132.715,62.154 156.87,86.309 v1(156.87,88.265)
TDI2_LVCMOS33: J5.33 U1.G1 | length 123.1
  Top Layer w0.203: J5.33@49.225,88.5 v1(50.343,88.5) ; U1.G1@158.37,101.774 v1(158.369,102.38)
  Signal Layer 2 w0.102: v1(50.343,88.5) 57.182,88.5 80.264,111.582 149.167,111.582 v1(158.369,102.38)
TDI3_LVCMOS33: J6.33 U1.L1 | length 96.2
  Top Layer w0.203: J6.33@69.225,88.5 70.301,88.5 v1(70.333,88.468) ; U1.L1@154.37,101.774 154.37,102.369 v1(154.381,102.38)
  Signal Layer 2 w0.102: v1(70.333,88.468) 77.267,88.468 96.774,107.975 148.786,107.975 v1(154.381,102.38)
TDI4_LVCMOS33: J7.33 U1.R1 | length 69.7
  Top Layer w0.152: J7.33@89.225,88.5 90.316,88.5 v1(90.348,88.468)
  Top Layer w0.203: v1(150.368,102.38) 150.37,102.378 U1.R1@150.37,101.774
  Signal Layer 2 w0.102: v1(90.348,88.468) 97.409,88.468 113.894,104.953 147.795,104.953 v1(150.368,102.38)
TDI5_LVCMOS33: J8.33 U1.P15 | length 44.9
  Top Layer w0.152: J8.33@109.225,88.5 110.331,88.5 v1(110.338,88.494)
  Top Layer w0.203: v1(150.876,87.267) 151.37,87.761 U1.P15@151.37,87.774
  Signal Layer 1 w0.102: v1(110.338,88.494) 145.136,88.494 148.311,85.319 149.631,85.319 150.876,86.563 v1(150.876,87.267)
TDI6_LVCMOS33: J9.33 U1.T15 | length 20.4
  Top Layer w0.102: J9.33@129.225,88.5 148.644,88.5 U1.T15@149.37,87.774
TDO1_LVCMOS33: J4.36 U1.L14 | length 151.3
  Top Layer w0.203: J4.36@29.225,90 30.32,90 v1(30.353,89.967) ; v1(153.873,88.265) 154.37,88.762 U1.L14@154.37,88.774
  Signal Layer 1 w0.102: v1(30.353,89.967) 32.283,89.967 43.256,78.994 43.256,71.653 50.114,64.795 132.131,64.795 154.381,87.046 154.381,87.757 v1(153.873,88.265)
TDO2_LVCMOS33: J5.36 U1.D1 | length 128.1
  Top Layer w0.152: v1@50.335,90 v1(50.343,89.992)
  Top Layer w0.203: J5.36@49.225,90 v1@50.335,90 ; v1(161.366,102.38) 161.37,102.376 U1.D1@161.37,101.774
  Signal Layer 2 w0.102: v1(50.343,89.992) 55.651,89.992 80.416,114.757 148.989,114.757 v1(161.366,102.38)
TDO3_LVCMOS33: J6.36 U1.H1 | length 100.7
  Top Layer w0.203: J6.36@69.225,90 v1(70.333,90) ; U1.H1@157.37,101.774 157.37,102.371 v1(157.378,102.38)
  Signal Layer 2 w0.102: v1(70.333,90) 75.878,90 96.469,110.592 149.167,110.592 v1(157.378,102.38)
TDO4_LVCMOS33: J7.36 U1.M1 | length 73.8
  Top Layer w0.152: J7.36@89.225,90 89.233,89.992 v1(90.348,89.992)
  Top Layer w0.203: v1(153.365,102.38) 153.37,102.375 U1.M1@153.37,101.774
  Signal Layer 2 w0.102: v1(90.348,89.992) 96.342,89.992 113.436,107.086 148.659,107.086 v1(153.365,102.38)
TDO5_LVCMOS33: J8.36 U1.R12 | length 41.5
  Top Layer w0.152: J8.36@109.225,90 v1(110.338,90)
  Top Layer w0.203: v1(149.871,90.272) 150.37,90.77 U1.R12@150.37,90.774
  Signal Layer 1 w0.102: v1(110.338,90) 149.6,90 v1(149.871,90.272)
TDO6_LVCMOS33: J9.36 U1.T12 | length 20.5
  Top Layer w0.102: J9.36@129.225,90 147.074,90 147.848,90.774 U1.T12@149.37,90.774
TMS1_LVCMOS33: J4.34 U1.J14 | length 154
  Top Layer w0.203: J4.34@29.225,89 30.351,89 v1(30.353,89.002) ; v1(155.878,88.265) 155.878,88.282 U1.J14@156.37,88.774
  Signal Layer 1 w0.102: v1(30.353,89.002) 30.963,89.002 41.783,78.181 41.783,70.815 49.555,63.043 132.512,63.043 155.372,85.903 155.372,87.759 v1(155.878,88.265)
TMS2_LVCMOS33: J5.34 U1.F1 | length 124.8
  Top Layer w0.203: J5.34@49.225,89 50.319,89 v1(50.343,88.976) ; v1(159.36,102.38) 159.37,102.37 U1.F1@159.37,101.774
  Signal Layer 2 w0.102: v1(50.343,88.976) 56.642,88.976 80.239,112.573 149.167,112.573 v1(159.36,102.38)
TMS3_LVCMOS33: J6.34 U1.K1 | length 97.6
  Top Layer w0.203: J6.34@69.225,89 70.309,89 v1(70.333,88.976) ; U1.K1@155.37,101.774 155.37,102.378 v1(155.372,102.38)
  Signal Layer 2 w0.102: v1(70.333,88.976) 76.784,88.976 96.596,108.788 148.964,108.788 v1(155.372,102.38)
TMS4_LVCMOS33: J7.34 U1.P1 | length 71
  Top Layer w0.203: J7.34@89.225,89 90.346,89 v1(90.348,89.002) ; U1.P1@151.37,101.774 v1(151.37,102.38)
  Signal Layer 2 w0.102: v1(90.348,89.002) 97.053,89.002 113.665,105.613 148.137,105.613 v1(151.37,102.38)
TMS5_LVCMOS33: J8.34 U1.R15 | length 42.1
  Top Layer w0.152: J8.34@109.225,89 v1(110.338,89)
  Top Layer w0.203: v1(149.871,87.267) 150.37,87.766 U1.R15@150.37,87.774
  Signal Layer 1 w0.102: v1(110.338,89) 148.138,89 v1(149.871,87.267)
TMS6_LVCMOS33: J9.34 U1.T14 | length 20.2
  Top Layer w0.102: J9.34@129.225,89 149.144,89 U1.T14@149.37,88.774
Vbaseline1: J4.17 J4.18 U2.F4 | length 77.7
  Top Layer w0.152: v3(80.035,52.527) 80.288,52.275 U2.F4@80.288,52.273
  Top Layer w0.203: v1(28.118,80.493) 28.125,80.5 J4.17@29.225,80.5 J4.18@29.225,81
  Signal Layer 1 w0.203: v1(28.118,80.493) 26.365,78.74 26.365,64.16 38.252,52.273 79.781,52.273 v3(80.035,52.527)
Vbaseline2: J5.17 J5.18 U2.G6 | length 64.1
  Top Layer w0.203: J5.18@49.225,81 J5.17@49.225,80.5 45.118,80.5 41.072,76.454 41.072,68.504 48.514,61.062 64.211,61.062 74,51.273 U2.G6@79.788,51.273
Vbaseline3: J6.17 J6.18 U2.G4 | length 43.2
  Top Layer w0.203: J6.18@69.225,81 J6.17@69.225,80.5 65.768,80.5 62.078,76.81 62.078,66.345 76.149,52.273 U2.G4@79.788,52.273
Vbaseline4: J7.17 J7.18 U2.G2 | length 38
  Top Layer w0.203: U2.G2@79.788,53.273 78.223,53.273 75.971,55.524 75.971,61.316 81.356,66.7 81.356,76.556 85.301,80.5 J7.17@89.225,80.5 J7.18@89.225,81
Vbaseline5: J8.17 J8.18 U2.A3 | length 43.6
  Top Layer w0.203: U2.A3@82.788,52.773 86.504,52.773 101.397,67.666 101.397,76.53 105.367,80.5 J8.17@109.225,80.5 J8.18@109.225,81
Vbaseline6: J9.17 J9.18 U2.A5 | length 62
  Top Layer w0.203: U2.A5@82.788,51.773 88.078,51.773 100.643,64.338 115.621,64.338 121.996,70.714 121.996,76.048 126.449,80.5 J9.17@129.225,80.5 J9.18@129.225,81
Vbaselinemonitor: U2.B5 U5.9 | length 86.3
  Top Layer w0.152: v3(82.042,52.019) U2.B5@82.288,51.773
  Top Layer w0.203: v1(151.37,76.084) U5.9@151.802,76.084
  Signal Layer 1 w0.152: v3(82.042,52.019) 137.871,52.019 147.396,61.544 147.396,71.171 151.37,75.144 v1(151.37,76.084)
Vltm4644temp: R5.2 U5.12 U7.F3 | length 12.1
  Top Layer w0.254: U5.12@153.302,76.084 v1(153.772,76.084) ; U7.F3@157.429,67.945 157.455,67.945 v1(157.912,67.488)
  Signal Layer 1 w0.254: v1(153.772,76.084) 157.912,71.944 v1(157.912,67.488)
  Bottom Layer w0.254: v1(157.912,67.488) 157.922,67.498 R5.2@157.922,68.174
Vthee1: J4.13 J4.14 U2.F3 | length 73.7
  Top Layer w0.152: v3(80.035,53.035) 80.288,52.783 U2.F3@80.288,52.773
  Top Layer w0.203: v1(28.118,78.511) 28.129,78.5 J4.13@29.225,78.5 J4.14@29.225,79
  Signal Layer 1 w0.203: v1(28.118,78.511) 27.356,77.749 27.356,64.516 38.837,53.035 v3(80.035,53.035)
Vthee2: J5.13 J5.14 U2.G5 | length 59
  Top Layer w0.203: J5.14@49.225,79 J5.13@49.225,78.5 46.344,78.5 42.393,74.549 42.393,69.088 49.355,62.125 64.722,62.125 75.074,51.773 U2.G5@79.788,51.773
Vthee3: J6.13 J6.14 U2.G3 | length 38.6
  Top Layer w0.203: J6.14@69.225,79 J6.13@69.225,78.5 66.435,78.5 63.424,75.489 63.424,66.548 77.199,52.773 U2.G3@79.788,52.773
Vthee4: J7.13 J7.14 U2.A2 | length 36.8
  Top Layer w0.203: U2.A2@82.788,53.273 85.684,53.273 88.468,56.058 88.468,60.896 82.677,66.687 82.677,75.209 85.968,78.5 J7.13@89.225,78.5 J7.14@89.225,79
Vthee5: J8.13 J8.14 U2.A4 | length 42.1
  Top Layer w0.203: U2.A4@82.788,52.273 87.376,52.273 102.489,67.386 102.489,74.752 106.237,78.5 J8.13@109.225,78.5 J8.14@109.225,79
Vthee6: J9.13 J9.14 U2.A6 | length 60.7
  Top Layer w0.203: U2.A6@82.788,51.273 88.738,51.273 100.94,63.475 115.976,63.475 122.834,70.333 122.834,74.574 126.76,78.5 J9.13@129.225,78.5 J9.14@129.225,79
Vtheemonitor: R7.2 U3.6 U5.10 | length 87.4
  Top Layer w0.203: v1(152.302,75.59) U5.10@152.302,76.084
  Top Layer w0.508: v1(90.588,37.084) 90.602,37.07 U3.6@90.602,35.65
  Signal Layer 1 w0.203: v1(90.588,37.084) 96.125,42.621 130.937,42.621 148.514,60.198 148.514,70.739 152.302,74.528 v1(152.302,75.59)
  Bottom Layer w0.508: v1(90.588,37.084) 91.25,37.084 R7.2@91.491,36.844
pads on no net: J1.0 J2.0 J3.0 U1.A2 U1.A3 U1.A13 U1.A14 U1.B1 U1.B2 U1.B3 U1.B14 U1.B15 U1.B16 U1.C1 U1.C2 U1.C3 U1.C13 U1.C15 U1.C16 U1.D3 U1.D11 U1.D12 U1.D14 U1.D16 U1.E2 U1.E3 U1.E4 U1.E6 U1.E11 U1.E12 U1.E13 U1.F2 U1.F3 U1.F4 U1.F5 U1.F6 U1.F7 U1.F10 U1.F12 U1.F13 U1.F14 U1.G3 U1.G5 U1.G6 U1.G11 U1.G12 U1.G14 U1.H2 U1.H3 U1.H4 U1.H5 U1.H11 U1.H13 U1.J3 U1.J4 U1.J6 U1.J11 U1.J12 U1.J13 U1.K2 U1.K3 U1.K5 U1.K6 U1.K11 U1.K12 U1.K15 U1.L3 U1.L4 U1.L5 U1.L7 U1.L8 U1.L11 U1.L12 U1.L13 U1.M2 U1.M3 U1.M4 U1.M5 U1.M9 U1.M13 U1.M14 U1.M15 U1.N3 U1.N4 U1.N8 U1.N14 U1.P2 U1.P13 U1.P14 U1.R2 U1.T2 U2.A1 U2.A7 U2.B3 U2.B4 U2.C5 U2.F5 U2.G1 U2.G7 U3.1 U3.5 U3.8 U5.7 U7.C1 U7.C2 U7.C3 U7.C7 U7.D1 U7.D2 U7.F2 U7.J1 U7.J2 U7.J3 U7.K1 U7.K2 U8.1 U8.8
copper on no net: | length 3.6
  Top Layer w0.254: v1(151.917,69.723) 152.349,69.291 152.349,69.215 152.197,69.215 ; v1(153.137,70.053) 153.568,70.485 153.619,70.485 ; 159.969,69.215 160.045,69.215 v1(160.553,69.723) ; 159.969,70.485 v1(159.969,71.145) ; 161.239,70.485 v1(161.239,71.145)

## Polygon pours and split planes (outlines as drawn)
PGND1 on Bottom Layer "Bottom Layer-PGND1" (hatched Horizontal grid 0.508 track 0.203, pour order 2): 200.381,31.979 200.33,32.029 38.837,32.029 38.837,62.281 142.138,62.281 142.164,62.306 142.138,118.339 200.33,118.339 200.381,125.4 24.613,125.4 24.613,24.613 200.381,24.613
GND on Internal Plane 1 (split plane): 174.191,115.875 174.201,115.775 174.23,115.679 174.277,115.591 174.34,115.514 174.418,115.45 174.506,115.403 174.602,115.374 174.701,115.364 190.193,115.364 190.193,58.09 190.203,57.99 190.232,57.894 190.279,57.806 190.342,57.729 190.42,57.665 190.508,57.618 190.604,57.589 190.703,57.579 199.871,57.579 199.871,25.129 25.129,25.129 25.129,124.871 174.191,124.871
PGND2 on Internal Plane 1 (split plane): 199.871,58.6 191.214,58.6 191.214,115.875 191.204,115.974 191.175,116.07 191.128,116.158 191.064,116.236 190.987,116.299 190.899,116.346 190.803,116.375 190.703,116.385 175.212,116.385 175.212,124.871 199.871,124.871
+3.3V on Internal Plane 2 (split plane): 199.871,25.129 25.129,25.129 25.129,124.871 199.871,124.871
+1.2V on Internal Plane 3 (split plane): 199.871,25.129 25.129,25.129 25.129,124.871 199.871,124.871
-7V on Internal Plane 4 (split plane): 141.501,67.318 132.202,58.019 132.138,57.942 132.091,57.853 132.062,57.758 132.052,57.658 132.052,46.33 132.062,46.23 132.091,46.134 132.138,46.046 132.202,45.969 132.279,45.905 132.367,45.858 132.463,45.829 132.563,45.819 199.871,45.819 199.871,25.129 25.129,25.129 25.129,124.871 141.501,124.871
+12V on Internal Plane 4 (split plane): 199.871,46.84 133.073,46.84 133.073,57.447 142.372,66.746 142.436,66.823 142.483,66.911 142.512,67.007 142.522,67.107 142.522,124.871 199.871,124.871

## Other copper
Bottom Layer:
  rectangle net -7V: 52.934,35.712 61.824,45.618
Internal Plane 1 (plane layer: these items are gaps in the copper):
  lines w1.016: 174.676,125.381 174.701,125.356 174.701,115.875 190.703,115.875 190.703,58.09 200.381,58.09
Internal Plane 4 (plane layer: these items are gaps in the copper):
  lines w1.016: 142.011,125.324 142.011,67.107 132.563,57.658 132.563,46.33 200.356,46.33 200.381,46.304

## Silkscreen, mask and mechanical layers (free items; w line width, h text height)
Top Overlay:
  lines w0.762: 25,25 200,25 200,125 25,125 25,25
  text "JUNOPRC6Cv3" at 34.442,119.482 h1.52
  text "jxs 20250610" at 34.442,117.424 h1.52
  text "TMS" at 170.815,74.879 h1.52
  text "TDI" at 170.84,72.238 h1.52
  text "TDO" at 170.764,69.748 h1.52
  text "TMS" at 170.764,67.335 h1.52
  text "GND" at 170.764,64.592 h1.52
  text "+3.3V" at 167.792,61.976 h1.52

## Text inside footprints (layer, text, board x,y; h text height)
J4: Top Overlay "1" at 27.682,71.429 h1.52 r90
J5: Top Overlay "1" at 47.682,71.429 h1.52 r90
J6: Top Overlay "1" at 67.682,71.429 h1.52 r90
J7: Top Overlay "1" at 87.682,71.429 h1.52 r90
J8: Top Overlay "1" at 107.682,71.429 h1.52 r90
J9: Top Overlay "1" at 127.682,71.429 h1.52 r90